# EAGLE board 13660_weather-bit-panel.v10 (EAGLE 7.5.0), part 1 of 2
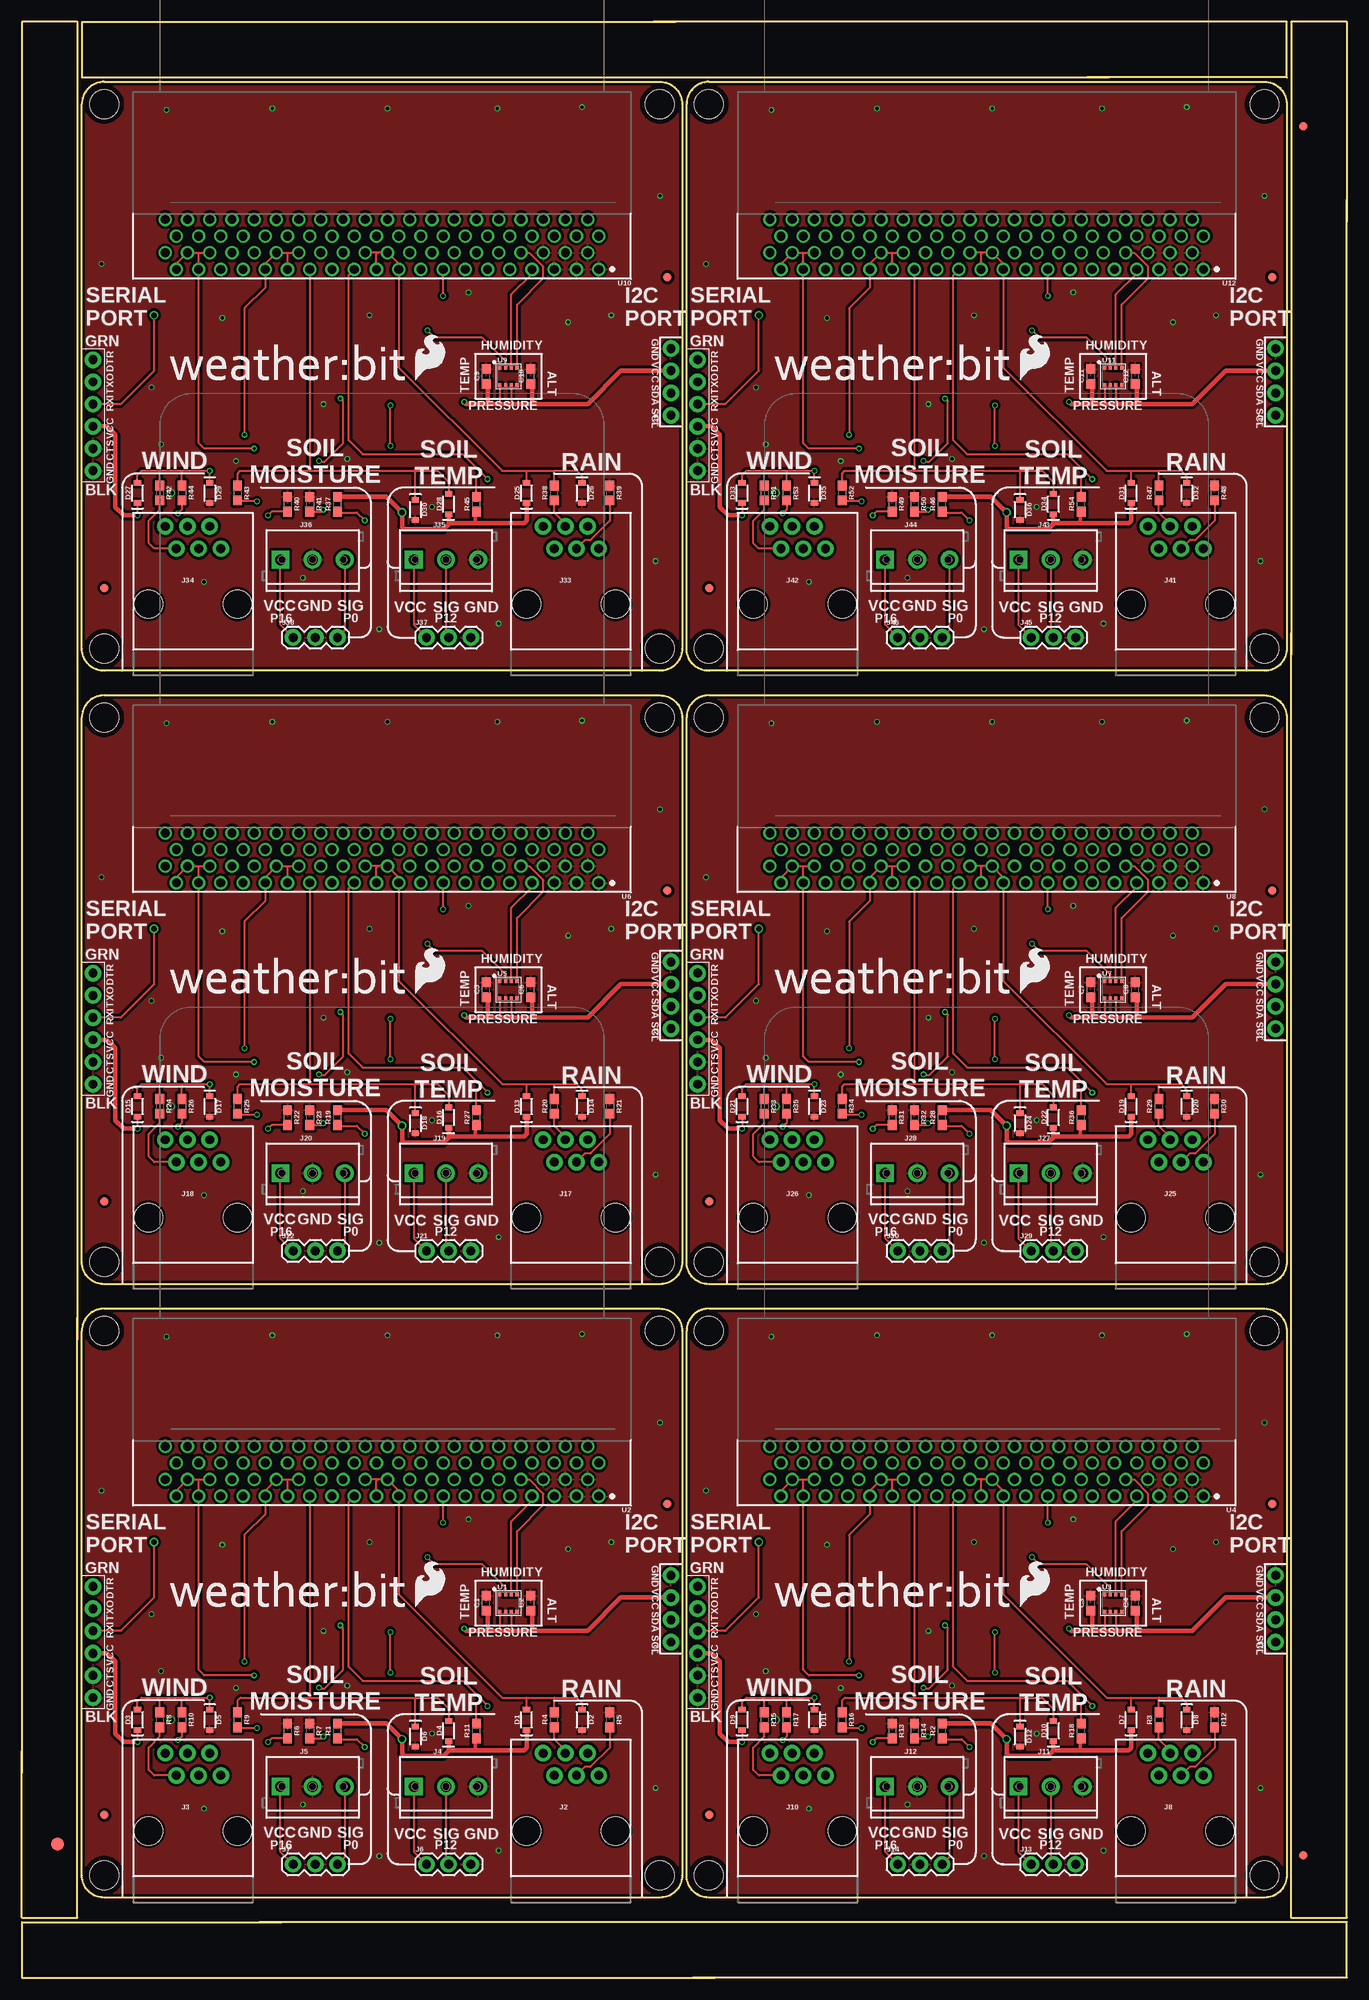
[diagram p0: board, top side]
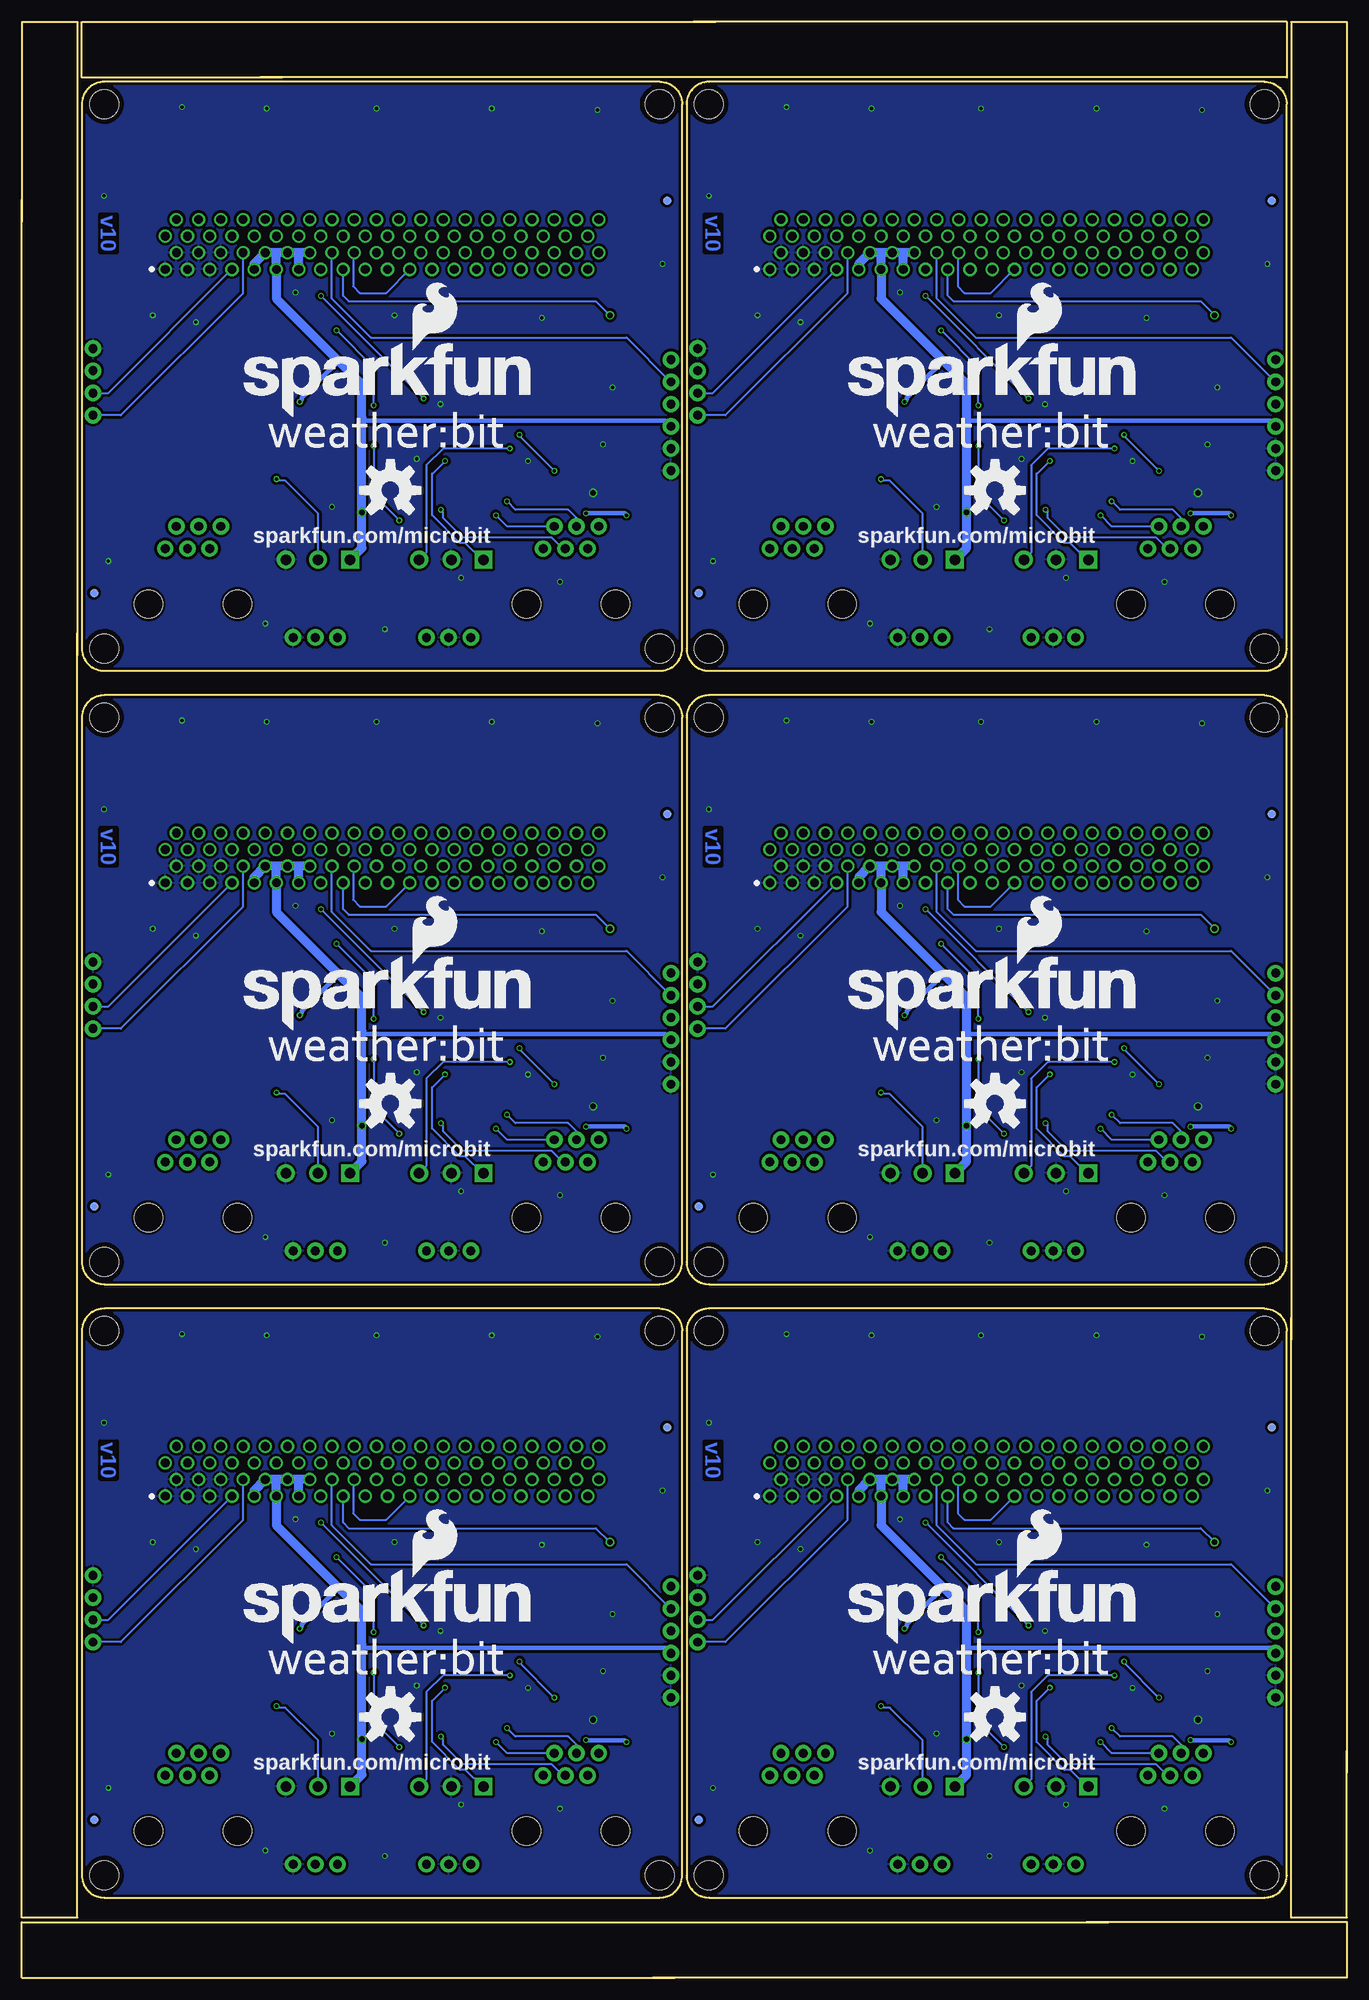
[diagram p1: board, bottom side, seen from below]

Size 151.38 x 223.52 mm. Coordinates in mm from the lower left corner, seen from the top.
Outline: 6.35,75.44 6.35,6.86 0,6.86 0,25.91
Outline: 0,23.37 0,223.52 6.35,223.52 6.35,72.9
Outline: 79.25,0 0,0 0,6.35 29.72,6.35
Outline: 27.18,6.35 151.38,6.35 151.38,0 76.71,0
Outline: 72.14,223.52 144.53,223.52 144.53,217.17 121.67,217.17
Outline: 124.21,217.17 6.86,217.17 6.86,223.52 74.68,223.52
Outline: 145.03,151.13 145.03,223.52 151.38,223.52 151.38,200.66
Outline: 151.38,203.2 151.38,6.86 145.03,6.86 145.03,153.67
Outline: 9.4,76.45 72.9,76.45 arc-90 75.44,73.91 75.44,11.68 arc-90 72.9,9.14 9.4,9.14 arc-90 6.86,11.68 6.86,73.91 arc-90 9.4,76.45
Outline: 78.49,76.45 141.99,76.45 arc-90 144.53,73.91 144.53,11.68 arc-90 141.99,9.14 78.49,9.14 arc-90 75.95,11.68 75.95,73.91 arc-90 78.49,76.45
Outline: 9.4,146.56 72.9,146.56 arc-90 75.44,144.02 75.44,81.79 arc-90 72.9,79.25 9.4,79.25 arc-90 6.86,81.79 6.86,144.02 arc-90 9.4,146.56
Outline: 78.49,146.56 141.99,146.56 arc-90 144.53,144.02 144.53,81.79 arc-90 141.99,79.25 78.49,79.25 arc-90 75.95,81.79 75.95,144.02 arc-90 78.49,146.56
Outline: 9.4,216.66 72.9,216.66 arc-90 75.44,214.12 75.44,151.89 arc-90 72.9,149.35 9.4,149.35 arc-90 6.86,151.89 6.86,214.12 arc-90 9.4,216.66
Outline: 78.49,216.66 141.99,216.66 arc-90 144.53,214.12 144.53,151.89 arc-90 141.99,149.35 78.49,149.35 arc-90 75.95,151.89 75.95,214.12 arc-90 78.49,216.66
Copper layers (1*16): Top 0.035mm / dielectric 1.5mm / Bottom 0.035mm
Design rules "SparkFun-2-layer-FAB-LIMIT": minimum track width 4mil, minimum drill 6mil, track to track 4mil, track to pad 4mil, pad to pad 4mil, via to via 4mil, smd to smd 4mil, copper to edge 4mil, drill to drill 4mil, minimum pad ring 5mil, minimum via ring 5mil, stop-mask expansion 4mil, vias tented up to drill 25mil, thermal gap 10mil

## Footprints (pad centres in the part's own frame; a part is rotated, then mirrored left to right if it is on the bottom)
0603 = smd 1.1 x 1: 1 -0.85,0; 2 0.85,0
SOD-323 = smd 0.63 x 0.83: A 1.15,0; C -1.15,0
FIDUCIAL-1.5X3 = smd 1.5 x 1.5: 1 0,0
FIDUCIAL-1X2 = smd 1 x 1: 1 0,0
STAND-OFF = hole 3.302: 0,0
6_PIN_SERIAL_TARGET_SIDE_W_SILK = drill 1.016 pad 1.88: P$1 -6.35,0; P$2 -3.81,0; P$3 -1.27,0; P$4 1.27,0; P$5 3.81,0; P$6 6.35,0
RJ11-6 = drill 1.016 pad 1.88: 1 -3.175,8.89; 2 -1.905,6.35; 3 -0.635,8.89; 4 0.635,6.35; 5 1.905,8.89; 6 3.175,6.35 | hole 3.251: -5.08,0; 5.08,0
SCREWTERMINAL-3.5MM-3_LOCK.007S = drill 1.2 pad 2.032 square: 1 -0.178,0 | drill 1.2 pad 2.032: 2 3.5,0; 3 7.178,0
1X03 = drill 1.016 pad 1.88: 1 0,0; 2 2.54,0; 3 5.08,0
1X04_NO_SILK = drill 1.016 pad 1.88: 1 0,0; 2 2.54,0; 3 5.08,0; 4 7.62,0
LGA-8-2.5X2.5 = smd 0.35 x 0.5: 1 -0.975,1.025; 2 -0.325,1.025; 3 0.325,1.025; 4 0.975,1.025; 5 0.975,-1.025; 6 0.325,-1.025; 7 -0.325,-1.025; 8 -0.975,-1.025
MICRO:BIT_RA_PTH = drill 1: A1 -24.765,7.62; A2 -23.495,5.72; A3 -22.225,7.62; A4 -20.955,5.72; A5 -19.685,7.62; A6 -18.415,5.72; A7 -17.145,7.62; A8 -15.875,5.72; A9 -14.605,7.62; A10 -13.335,5.72; A11 -12.065,7.62; A12 -10.795,5.72; A13 -9.525,7.62; A14 -8.255,5.72; A15 -6.985,7.62; A16 -5.715,5.72; A17 -4.445,7.62; A18 -3.175,5.72; A19 -1.905,7.62; A20 -0.635,5.72; A21 0.635,7.62; A22 1.905,5.72; A23 3.175,7.62; A24 4.445,5.72; A25 5.715,7.62; A26 6.985,5.72; A27 8.255,7.62; A28 9.525,5.72; A29 10.795,7.62; A30 12.065,5.72; A31 13.335,7.62; A32 14.605,5.72; A33 15.875,7.62; A34 17.145,5.72; A35 18.415,7.62; A36 19.685,5.72; A37 20.955,7.62; A38 22.225,5.72; A39 23.495,7.62; A40 24.765,5.72; B1 -24.765,3.82; B2 -23.495,1.92; B3 -22.225,3.82; B4 -20.955,1.92; B5 -19.685,3.82; B6 -18.415,1.92; B7 -17.145,3.82; B8 -15.875,1.92; B9 -14.605,3.82; B10 -13.335,1.92; B11 -12.065,3.82; B12 -10.795,1.92; B13 -9.525,3.82; B14 -8.255,1.92; B15 -6.985,3.82; B16 -5.715,1.92; B17 -4.445,3.82; B18 -3.175,1.92; B19 -1.905,3.82; B20 -0.635,1.92; B21 0.635,3.82; B22 1.905,1.92; B23 3.175,3.82; B24 4.445,1.92; B25 5.715,3.82; B26 6.985,1.92; B27 8.255,3.82; B28 9.525,1.92; B29 10.795,3.82; B30 12.065,1.92; B31 13.335,3.82; B32 14.605,1.92; B33 15.875,3.82; B34 17.145,1.92; B35 18.415,3.82; B36 19.685,1.92; B37 20.955,3.82; B38 22.225,1.92; B39 23.495,3.82; B40 24.765,1.92

## Placement (x,y rotation side)
C1  0.1uF  [0603]  53.05,42.8 90 top
C2  0.1uF  [0603]  58.13,42.8 90 top
C3  0.1uF  [0603]  122.14,42.8 90 top
C4  0.1uF  [0603]  127.22,42.8 90 top
C5  0.1uF  [0603]  53.05,112.9 90 top
C6  0.1uF  [0603]  58.13,112.9 90 top
C7  0.1uF  [0603]  122.14,112.9 90 top
C8  0.1uF  [0603]  127.22,112.9 90 top
C9  0.1uF  [0603]  53.05,183.01 90 top
C10  0.1uF  [0603]  58.13,183.01 90 top
C11  0.1uF  [0603]  122.14,183.01 90 top
C12  0.1uF  [0603]  127.22,183.01 90 top
D1  250mA/100V  [SOD-323]  57.66,29.46 90 top
D2  250mA/100V  [SOD-323]  64.01,29.46 270 top
D3  250mA/100V  [SOD-323]  13.21,29.46 90 top
D4  250mA/100V  [SOD-323]  48.77,28.19 90 top
D5  250mA/100V  [SOD-323]  21.46,29.46 270 top
D6  250mA/100V  [SOD-323]  44.96,27.56 270 top
D7  250mA/100V  [SOD-323]  126.75,29.46 90 top
D8  250mA/100V  [SOD-323]  133.1,29.46 270 top
D9  250mA/100V  [SOD-323]  82.3,29.46 90 top
D10  250mA/100V  [SOD-323]  117.86,28.19 90 top
D11  250mA/100V  [SOD-323]  90.55,29.46 270 top
D12  250mA/100V  [SOD-323]  114.05,27.56 270 top
D13  250mA/100V  [SOD-323]  57.66,99.57 90 top
D14  250mA/100V  [SOD-323]  64.01,99.57 270 top
D15  250mA/100V  [SOD-323]  13.21,99.57 90 top
D16  250mA/100V  [SOD-323]  48.77,98.3 90 top
D17  250mA/100V  [SOD-323]  21.46,99.57 270 top
D18  250mA/100V  [SOD-323]  44.96,97.66 270 top
D19  250mA/100V  [SOD-323]  126.75,99.57 90 top
D20  250mA/100V  [SOD-323]  133.1,99.57 270 top
D21  250mA/100V  [SOD-323]  82.3,99.57 90 top
D22  250mA/100V  [SOD-323]  117.86,98.3 90 top
D23  250mA/100V  [SOD-323]  90.55,99.57 270 top
D24  250mA/100V  [SOD-323]  114.05,97.66 270 top
D25  250mA/100V  [SOD-323]  57.66,169.67 90 top
D26  250mA/100V  [SOD-323]  64.01,169.67 270 top
D27  250mA/100V  [SOD-323]  13.21,169.67 90 top
D28  250mA/100V  [SOD-323]  48.77,168.4 90 top
D29  250mA/100V  [SOD-323]  21.46,169.67 270 top
D30  250mA/100V  [SOD-323]  44.96,167.77 270 top
D31  250mA/100V  [SOD-323]  126.75,169.67 90 top
D32  250mA/100V  [SOD-323]  133.1,169.67 270 top
D33  250mA/100V  [SOD-323]  82.3,169.67 90 top
D34  250mA/100V  [SOD-323]  117.86,168.4 90 top
D35  250mA/100V  [SOD-323]  90.55,169.67 270 top
D36  250mA/100V  [SOD-323]  114.05,167.77 270 top
E$1  [FIDUCIAL-1.5X3]  4.06,15.24 0 top
E$7  [FIDUCIAL-1X2]  146.43,211.58 180 top
E$8  [FIDUCIAL-1X2]  146.43,13.97 0 top
FD1  FIDUCIAL1X2  [FIDUCIAL-1X2]  9.43,18.61 0 top
FD2  FIDUCIAL1X2  [FIDUCIAL-1X2]  73.76,54.13 0 top
FD3  FIDUCIAL1X2  [FIDUCIAL-1X2]  8.57,62.9 0 bottom
FD4  FIDUCIAL1X2  [FIDUCIAL-1X2]  74.04,18.03 0 bottom
FD5  FIDUCIAL1X2  [FIDUCIAL-1X2]  78.52,18.61 0 top
FD6  FIDUCIAL1X2  [FIDUCIAL-1X2]  142.84,54.13 0 top
FD7  FIDUCIAL1X2  [FIDUCIAL-1X2]  77.66,62.9 0 bottom
FD8  FIDUCIAL1X2  [FIDUCIAL-1X2]  143.13,18.03 0 bottom
FD9  FIDUCIAL1X2  [FIDUCIAL-1X2]  9.43,88.71 0 top
FD10  FIDUCIAL1X2  [FIDUCIAL-1X2]  73.76,124.24 0 top
FD11  FIDUCIAL1X2  [FIDUCIAL-1X2]  8.57,133 0 bottom
FD12  FIDUCIAL1X2  [FIDUCIAL-1X2]  74.04,88.14 0 bottom
FD13  FIDUCIAL1X2  [FIDUCIAL-1X2]  78.52,88.71 0 top
FD14  FIDUCIAL1X2  [FIDUCIAL-1X2]  142.84,124.24 0 top
FD15  FIDUCIAL1X2  [FIDUCIAL-1X2]  77.66,133 0 bottom
FD16  FIDUCIAL1X2  [FIDUCIAL-1X2]  143.13,88.14 0 bottom
FD17  FIDUCIAL1X2  [FIDUCIAL-1X2]  9.43,158.81 0 top
FD18  FIDUCIAL1X2  [FIDUCIAL-1X2]  73.76,194.34 0 top
FD19  FIDUCIAL1X2  [FIDUCIAL-1X2]  8.57,203.1 0 bottom
FD20  FIDUCIAL1X2  [FIDUCIAL-1X2]  74.04,158.24 0 bottom
FD21  FIDUCIAL1X2  [FIDUCIAL-1X2]  78.52,158.81 0 top
FD22  FIDUCIAL1X2  [FIDUCIAL-1X2]  142.84,194.34 0 top
FD23  FIDUCIAL1X2  [FIDUCIAL-1X2]  77.66,203.1 0 bottom
FD24  FIDUCIAL1X2  [FIDUCIAL-1X2]  143.13,158.24 0 bottom
H1  STAND-OFF  [STAND-OFF]  9.4,73.91 0 top
H2  STAND-OFF  [STAND-OFF]  72.9,73.91 0 top
H3  STAND-OFF  [STAND-OFF]  9.4,11.68 0 top
H4  STAND-OFF  [STAND-OFF]  72.9,11.68 0 top
H5  STAND-OFF  [STAND-OFF]  78.49,73.91 0 top
H6  STAND-OFF  [STAND-OFF]  141.99,73.91 0 top
H7  STAND-OFF  [STAND-OFF]  78.49,11.68 0 top
H8  STAND-OFF  [STAND-OFF]  141.99,11.68 0 top
H9  STAND-OFF  [STAND-OFF]  9.4,144.02 0 top
H10  STAND-OFF  [STAND-OFF]  72.9,144.02 0 top
H11  STAND-OFF  [STAND-OFF]  9.4,81.79 0 top
H12  STAND-OFF  [STAND-OFF]  72.9,81.79 0 top
H13  STAND-OFF  [STAND-OFF]  78.49,144.02 0 top
H14  STAND-OFF  [STAND-OFF]  141.99,144.02 0 top
H15  STAND-OFF  [STAND-OFF]  78.49,81.79 0 top
H16  STAND-OFF  [STAND-OFF]  141.99,81.79 0 top
H17  STAND-OFF  [STAND-OFF]  9.4,214.12 0 top
H18  STAND-OFF  [STAND-OFF]  72.9,214.12 0 top
H19  STAND-OFF  [STAND-OFF]  9.4,151.89 0 top
H20  STAND-OFF  [STAND-OFF]  72.9,151.89 0 top
H21  STAND-OFF  [STAND-OFF]  78.49,214.12 0 top
H22  STAND-OFF  [STAND-OFF]  141.99,214.12 0 top
H23  STAND-OFF  [STAND-OFF]  78.49,151.89 0 top
H24  STAND-OFF  [STAND-OFF]  141.99,151.89 0 top
J1  [6_PIN_SERIAL_TARGET_SIDE_W_SILK]  8.13,38.35 270 top
J2  RJ11  [RJ11-6]  62.74,16.76 0 top
J3  RJ11  [RJ11-6]  19.56,16.76 0 top
J4  [SCREWTERMINAL-3.5MM-3_LOCK.007S]  44.96,21.84 0 top
J5  [SCREWTERMINAL-3.5MM-3_LOCK.007S]  29.72,21.84 0 top
J6  [1X03]  46.23,12.95 0 top
J7  [1X03]  30.99,12.95 0 top
J8  RJ11  [RJ11-6]  131.83,16.76 0 top
J9  [1X04_NO_SILK]  74.17,38.35 90 top
J10  RJ11  [RJ11-6]  88.65,16.76 0 top
J11  [SCREWTERMINAL-3.5MM-3_LOCK.007S]  114.05,21.84 0 top
J12  [SCREWTERMINAL-3.5MM-3_LOCK.007S]  98.81,21.84 0 top
J13  [1X03]  115.32,12.95 0 top
J14  [1X03]  100.08,12.95 0 top
J15  [1X04_NO_SILK]  143.26,38.35 90 top
J16  [6_PIN_SERIAL_TARGET_SIDE_W_SILK]  77.22,38.35 270 top
J17  RJ11  [RJ11-6]  62.74,86.87 0 top
J18  RJ11  [RJ11-6]  19.56,86.87 0 top
J19  [SCREWTERMINAL-3.5MM-3_LOCK.007S]  44.96,91.95 0 top
J20  [SCREWTERMINAL-3.5MM-3_LOCK.007S]  29.72,91.95 0 top
J21  [1X03]  46.23,83.06 0 top
J22  [1X03]  30.99,83.06 0 top
J23  [1X04_NO_SILK]  74.17,108.46 90 top
J24  [6_PIN_SERIAL_TARGET_SIDE_W_SILK]  8.13,108.46 270 top
J25  RJ11  [RJ11-6]  131.83,86.87 0 top
J26  RJ11  [RJ11-6]  88.65,86.87 0 top
J27  [SCREWTERMINAL-3.5MM-3_LOCK.007S]  114.05,91.95 0 top
J28  [SCREWTERMINAL-3.5MM-3_LOCK.007S]  98.81,91.95 0 top
J29  [1X03]  115.32,83.06 0 top
J30  [1X03]  100.08,83.06 0 top
J31  [1X04_NO_SILK]  143.26,108.46 90 top
J32  [6_PIN_SERIAL_TARGET_SIDE_W_SILK]  77.22,108.46 270 top
J33  RJ11  [RJ11-6]  62.74,156.97 0 top
J34  RJ11  [RJ11-6]  19.56,156.97 0 top
J35  [SCREWTERMINAL-3.5MM-3_LOCK.007S]  44.96,162.05 0 top
J36  [SCREWTERMINAL-3.5MM-3_LOCK.007S]  29.72,162.05 0 top
J37  [1X03]  46.23,153.16 0 top
J38  [1X03]  30.99,153.16 0 top
J39  [1X04_NO_SILK]  74.17,178.56 90 top
J40  [6_PIN_SERIAL_TARGET_SIDE_W_SILK]  8.13,178.56 270 top
J41  RJ11  [RJ11-6]  131.83,156.97 0 top
J42  RJ11  [RJ11-6]  88.65,156.97 0 top
J43  [SCREWTERMINAL-3.5MM-3_LOCK.007S]  114.05,162.05 0 top
J44  [SCREWTERMINAL-3.5MM-3_LOCK.007S]  98.81,162.05 0 top
J45  [1X03]  115.32,153.16 0 top
J46  [1X03]  100.08,153.16 0 top
J47  [1X04_NO_SILK]  143.26,178.56 90 top
J48  [6_PIN_SERIAL_TARGET_SIDE_W_SILK]  77.22,178.56 270 top
LOGO1  OSHW-LOGOL  [OSHW-LOGO-L]  109.28,29.78 0 bottom
LOGO2  SFE_LOGO_NAME_FLAME.3_INCH  [SFE_LOGO_NAME_FLAME_.3]  57.5,38.04 0 bottom
LOGO3  OSHW-LOGOL  [OSHW-LOGO-L]  40.2,29.78 0 bottom
LOGO4  SFE_LOGO_NAME_FLAME.3_INCH  [SFE_LOGO_NAME_FLAME_.3]  126.59,38.04 0 bottom
LOGO5  OSHW-LOGOL  [OSHW-LOGO-L]  40.2,99.89 0 bottom
LOGO6  SFE_LOGO_NAME_FLAME.3_INCH  [SFE_LOGO_NAME_FLAME_.3]  57.5,108.14 0 bottom
LOGO7  OSHW-LOGOL  [OSHW-LOGO-L]  109.28,99.89 0 bottom
LOGO8  SFE_LOGO_NAME_FLAME.3_INCH  [SFE_LOGO_NAME_FLAME_.3]  126.59,108.14 0 bottom
LOGO9  OSHW-LOGOL  [OSHW-LOGO-L]  40.2,169.99 0 bottom
LOGO10  SFE_LOGO_NAME_FLAME.3_INCH  [SFE_LOGO_NAME_FLAME_.3]  57.5,178.24 0 bottom
LOGO11  OSHW-LOGOL  [OSHW-LOGO-L]  109.28,169.99 0 bottom
LOGO12  SFE_LOGO_NAME_FLAME.3_INCH  [SFE_LOGO_NAME_FLAME_.3]  126.59,178.24 0 bottom
R1  4.7k  [0603]  36.07,28.19 90 top
R2  4.7k  [0603]  105.16,28.19 90 top
R3  1k  [0603]  129.92,29.46 90 top
R4  1k  [0603]  60.83,29.46 90 top
R5  1k  [0603]  67.18,29.46 270 top
R6  1k  [0603]  30.35,28.19 270 top
R7  1k  [0603]  32.89,28.19 270 top
R8  1k  [0603]  15.75,29.46 270 top
R9  1k  [0603]  24.64,29.46 270 top
R10  4.7k  [0603]  18.29,29.46 270 top
R11  4.7k  [0603]  51.94,28.19 90 top
R12  1k  [0603]  136.27,29.46 270 top
R13  1k  [0603]  99.44,28.19 270 top
R14  1k  [0603]  101.98,28.19 270 top
R15  1k  [0603]  84.84,29.46 270 top
R16  1k  [0603]  93.73,29.46 270 top
R17  4.7k  [0603]  87.38,29.46 270 top
R18  4.7k  [0603]  121.03,28.19 90 top
R19  4.7k  [0603]  36.07,98.3 90 top
R20  1k  [0603]  60.83,99.57 90 top
R21  1k  [0603]  67.18,99.57 270 top
R22  1k  [0603]  30.35,98.3 270 top
R23  1k  [0603]  32.89,98.3 270 top
R24  1k  [0603]  15.75,99.57 270 top
R25  1k  [0603]  24.64,99.57 270 top
R26  4.7k  [0603]  18.29,99.57 270 top
R27  4.7k  [0603]  51.94,98.3 90 top
R28  4.7k  [0603]  105.16,98.3 90 top
R29  1k  [0603]  129.92,99.57 90 top
R30  1k  [0603]  136.27,99.57 270 top
R31  1k  [0603]  99.44,98.3 270 top
R32  1k  [0603]  101.98,98.3 270 top
R33  1k  [0603]  84.84,99.57 270 top
R34  1k  [0603]  93.73,99.57 270 top
R35  4.7k  [0603]  87.38,99.57 270 top
R36  4.7k  [0603]  121.03,98.3 90 top
R37  4.7k  [0603]  36.07,168.4 90 top
R38  1k  [0603]  60.83,169.67 90 top
R39  1k  [0603]  67.18,169.67 270 top
R40  1k  [0603]  30.35,168.4 270 top
R41  1k  [0603]  32.89,168.4 270 top
R42  1k  [0603]  15.75,169.67 270 top
R43  1k  [0603]  24.64,169.67 270 top
R44  4.7k  [0603]  18.29,169.67 270 top
R45  4.7k  [0603]  51.94,168.4 90 top
R46  4.7k  [0603]  105.16,168.4 90 top
R47  1k  [0603]  129.92,169.67 90 top
R48  1k  [0603]  136.27,169.67 270 top
R49  1k  [0603]  99.44,168.4 270 top
R50  1k  [0603]  101.98,168.4 270 top
R51  1k  [0603]  84.84,169.67 270 top
R52  1k  [0603]  93.73,169.67 270 top
R53  4.7k  [0603]  87.38,169.67 270 top
R54  4.7k  [0603]  121.03,168.4 90 top
U1  BME280  [LGA-8-2.5X2.5]  55.59,42.8 0 top
U2  micro:bit  [MICRO:BIT_RA_PTH]  41.15,62.64 180 top
U3  BME280  [LGA-8-2.5X2.5]  124.68,42.8 0 top
U4  micro:bit  [MICRO:BIT_RA_PTH]  110.24,62.64 180 top
U5  BME280  [LGA-8-2.5X2.5]  55.59,112.9 0 top
U6  micro:bit  [MICRO:BIT_RA_PTH]  41.15,132.75 180 top
U7  BME280  [LGA-8-2.5X2.5]  124.68,112.9 0 top
U8  micro:bit  [MICRO:BIT_RA_PTH]  110.24,132.75 180 top
U9  BME280  [LGA-8-2.5X2.5]  55.59,183.01 0 top
U10  micro:bit  [MICRO:BIT_RA_PTH]  41.15,202.85 180 top
U11  BME280  [LGA-8-2.5X2.5]  124.68,183.01 0 top
U12  micro:bit  [MICRO:BIT_RA_PTH]  110.24,202.85 180 top
U$1  [SFE_LOGO_FLAME_.2]  44.62,42.16 0 top
U$2  [LOGO-WEATHERBIT]  16.77,42.16 0 top
U$3  [LOGO-WEATHERBIT]  54.28,34.44 0 bottom
U$4  [SFE_LOGO_FLAME_.2]  113.71,42.16 0 top
U$5  [LOGO-WEATHERBIT]  85.85,42.16 0 top
U$6  [LOGO-WEATHERBIT]  123.37,34.44 0 bottom
U$7  [SFE_LOGO_FLAME_.2]  44.62,112.26 0 top
U$8  [LOGO-WEATHERBIT]  16.77,112.27 0 top
U$9  [LOGO-WEATHERBIT]  54.28,104.55 0 bottom
U$10  [SFE_LOGO_FLAME_.2]  113.71,112.26 0 top
U$11  [LOGO-WEATHERBIT]  85.85,112.27 0 top
U$12  [LOGO-WEATHERBIT]  123.37,104.55 0 bottom
U$13  [SFE_LOGO_FLAME_.2]  44.62,182.36 0 top
U$14  [LOGO-WEATHERBIT]  16.77,182.37 0 top
U$15  [LOGO-WEATHERBIT]  54.28,174.65 0 bottom
U$16  [SFE_LOGO_FLAME_.2]  113.71,182.36 0 top
U$17  [LOGO-WEATHERBIT]  85.85,182.37 0 top
U$18  [LOGO-WEATHERBIT]  123.37,174.65 0 bottom

## Library data of the parts
C1-C12 = SparkFun-Capacitors; PROD_ID: CAP-00810
D1-D36 = SparkFun-DiscreteSemi; PROD_ID: DIO-09646
E$1 = SparkFun-Retired
E$7 E$8 FD1-FD24 LOGO1-LOGO12 U$1 U$4 U$7 U$10 U$13 U$16 = SparkFun-Aesthetics
H1-H24 = SparkFun-Electromechanical
J1 J6 J7 J13 J14 J16 J21 J22 J24 J29 J30 J32 J37 J38 J40 J45 J46 J48 = SparkFun-Connectors
J2 J3 J8 J10 J17 J18 J25 J26 J33 J34 J41 J42 = SparkFun-Connectors; PROD_ID: CONN-08590; SF_ID: PRT-00132
J4 J5 J11 J12 J19 J20 J27 J28 J35 J36 J43 J44 = SparkFun-Connectors; PROD_ID: CONN-08288; SF_ID: PRT-08235
J9 J15 J23 J31 J39 J47 = SparkFun-Connectors; PROD_ID: CONN-09696
R1 R2 R10 R11 R17-R19 R26-R28 R35-R37 R44-R46 R53 R54 = SparkFun-Resistors; PROD_ID: RES-07857
R3-R9 R12-R16 R20-R25 R29-R34 R38-R43 R47-R52 = SparkFun-Resistors; PROD_ID: RES-07856
U1 U3 U5 U7 U9 U11 = SparkFun-Sensors; PROD_ID: IC-13090
U2 U4 U6 U8 U10 U12 = Micro_Bit_Parts; PROD_ID: CONN-13452
U$2 U$3 U$5 U$6 U$8 U$9 U$11 U$12 U$14 U$15 U$17 U$18 = Micro_Bit_LOGOS

## Nets
1: U4.A24
2: U4.A25
3: U2.A40
3.3V: C1.1 C2.1 D1.C D3.C D4.C J1.P$4 J4.1 J6.1 J9.3 R1.2 R10.2 R11.1 U1.6 U1.8 U2.A9 U2.A10 U2.A11 U2.A12 U2.A13 U2.A14
3.3V1: C3.1 C4.1 D7.C D9.C D10.C J11.1 J13.1 J15.3 J16.P$4 R2.2 R17.2 R18.1 U3.6 U3.8 U4.A9 U4.A10 U4.A11 U4.A12 U4.A13 U4.A14
3.3V2: C5.1 C6.1 D13.C D15.C D16.C J19.1 J21.1 J23.3 J24.P$4 R19.2 R26.2 R27.1 U5.6 U5.8 U6.A9 U6.A10 U6.A11 U6.A12 U6.A13 U6.A14
3.3V3: C7.1 C8.1 D19.C D21.C D22.C J27.1 J29.1 J31.3 J32.P$4 R28.2 R35.2 R36.1 U7.6 U7.8 U8.A9 U8.A10 U8.A11 U8.A12 U8.A13 U8.A14
3.3V4: C9.1 C10.1 D25.C D27.C D28.C J35.1 J37.1 J39.3 J40.P$4 R37.2 R44.2 R45.1 U9.6 U9.8 U10.A9 U10.A10 U10.A11 U10.A12 U10.A13 U10.A14
3.3V5: C11.1 C12.1 D31.C D33.C D34.C J43.1 J45.1 J47.3 J48.P$4 R46.2 R53.2 R54.1 U11.6 U11.8 U12.A9 U12.A10 U12.A11 U12.A12 U12.A13 U12.A14
4: U2.A35
5: U2.A34
6: U2.A33
7: U2.A32
8: U4.A32
9: U2.A26
10: U2.A25
11: U2.A24
12: U4.A33
13: U4.A34
14: U4.A35
15: U4.A40
16: U4.A26
17: U6.A24
18: U6.A25
19: U6.A32
20: U6.A33
21: U6.A34
22: U6.A35
23: U6.A40
24: U6.A26
25: U8.A24
26: U8.A25
27: U8.A32
28: U8.A33
29: U8.A34
30: U8.A35
31: U8.A40
32: U8.A26
33: U10.A24
34: U10.A25
35: U10.A32
36: U10.A33
37: U10.A34
38: U10.A35
39: U10.A40
40: U10.A26
41: U12.A24
42: U12.A25
43: U12.A32
44: U12.A33
45: U12.A34
46: U12.A35
47: U12.A40
48: U12.A26
GND: C1.2 C2.2 D2.A D5.A D6.A J1.P$5 J1.P$6 J4.3 J5.2 J6.3 J7.2 J9.4 R5.1 R6.1 R7.1 U1.1 U1.5 U1.7 U2.A1 U2.A2 U2.A3 U2.A4 U2.A5 U2.A6
GND1: C3.2 C4.2 D8.A D11.A D12.A J11.3 J12.2 J13.3 J14.2 J15.4 J16.P$5 J16.P$6 R12.1 R13.1 R14.1 U3.1 U3.5 U3.7 U4.A1 U4.A2 U4.A3 U4.A4 U4.A5 U4.A6
GND2: C5.2 C6.2 D14.A D17.A D18.A J19.3 J20.2 J21.3 J22.2 J23.4 J24.P$5 J24.P$6 R21.1 R22.1 R23.1 U5.1 U5.5 U5.7 U6.A1 U6.A2 U6.A3 U6.A4 U6.A5 U6.A6
GND3: C7.2 C8.2 D20.A D23.A D24.A J27.3 J28.2 J29.3 J30.2 J31.4 J32.P$5 J32.P$6 R30.1 R31.1 R32.1 U7.1 U7.5 U7.7 U8.A1 U8.A2 U8.A3 U8.A4 U8.A5 U8.A6
GND4: C9.2 C10.2 D26.A D29.A D30.A J35.3 J36.2 J37.3 J38.2 J39.4 J40.P$5 J40.P$6 R39.1 R40.1 R41.1 U9.1 U9.5 U9.7 U10.A1 U10.A2 U10.A3 U10.A4 U10.A5 U10.A6
GND5: C11.2 C12.2 D32.A D35.A D36.A J43.3 J44.2 J45.3 J46.2 J47.4 J48.P$5 J48.P$6 R48.1 R49.1 R50.1 U11.1 U11.5 U11.7 U12.A1 U12.A2 U12.A3 U12.A4 U12.A5 U12.A6
N$2: R1.1 U1.2
N$3: R2.1 U3.2
N$4: J8.3 R3.1
N$5: J2.3 R4.1
N$6: J3.2 R8.2
N$7: J2.4 R5.2
N$8: J8.4 R12.2
N$9: J10.3 R16.2
N$11: J3.3 R9.2
N$12: J10.5 R13.2
N$13: J3.5 R6.2
N$14: J3.4 R7.2
N$15: J10.4 R14.2
N$16: J10.2 R15.2
N$17: R19.1 U5.2
N$18: J17.3 R20.1
N$19: J17.4 R21.2
N$20: J18.3 R25.2
N$21: J18.5 R22.2
N$22: J18.4 R23.2
N$23: J18.2 R24.2
N$24: R28.1 U7.2
N$25: J25.3 R29.1
N$26: J25.4 R30.2
N$27: J26.3 R34.2
N$28: J26.5 R31.2
N$29: J26.4 R32.2
N$30: J26.2 R33.2
N$31: R37.1 U9.2
N$32: J33.3 R38.1
N$33: J33.4 R39.2
N$34: J34.3 R43.2
N$35: J34.5 R40.2
N$36: J34.4 R41.2
N$37: J34.2 R42.2
N$38: R46.1 U11.2
N$39: J41.3 R47.1
N$40: J41.4 R48.2
N$41: J42.3 R52.2
N$42: J42.5 R49.2
N$43: J42.4 R50.2
N$44: J42.2 R51.2
RAIN: D1.A D2.C R4.2 U2.A19 U2.A20 U2.A21 U2.A22
RAIN1: D7.A D8.C R3.2 U4.A19 U4.A20 U4.A21 U4.A22
RAIN2: D13.A D14.C R20.2 U6.A19 U6.A20 U6.A21 U6.A22
RAIN3: D19.A D20.C R29.2 U8.A19 U8.A20 U8.A21 U8.A22
RAIN4: D25.A D26.C R38.2 U10.A19 U10.A20 U10.A21 U10.A22
RAIN5: D31.A D32.C R47.2 U12.A19 U12.A20 U12.A21 U12.A22
RXI: J1.P$3 U2.A17
RXI1: J16.P$3 U4.A17
RXI2: J24.P$3 U6.A17
RXI3: J32.P$3 U8.A17
RXI4: J40.P$3 U10.A17
RXI5: J48.P$3 U12.A17
SCL: J9.1 U1.4 U2.A8
SCL1: J15.1 U3.4 U4.A8
SCL2: J23.1 U5.4 U6.A8
SCL3: J31.1 U7.4 U8.A8
SCL4: J39.1 U9.4 U10.A8
SCL5: J47.1 U11.4 U12.A8
SDA: J9.2 U1.3 U2.A7
SDA1: J15.2 U3.3 U4.A7
SDA2: J23.2 U5.3 U6.A7
SDA3: J31.2 U7.3 U8.A7
SDA4: J39.2 U9.3 U10.A7
SDA5: J47.2 U11.3 U12.A7
SOIL_DAT: J5.3 J7.3 U2.A36 U2.A37 U2.A38 U2.A39
SOIL_DAT1: J12.3 J14.3 U4.A36 U4.A37 U4.A38 U4.A39
SOIL_DAT2: J20.3 J22.3 U6.A36 U6.A37 U6.A38 U6.A39
SOIL_DAT3: J28.3 J30.3 U8.A36 U8.A37 U8.A38 U8.A39
SOIL_DAT4: J36.3 J38.3 U10.A36 U10.A37 U10.A38 U10.A39
SOIL_DAT5: J44.3 J46.3 U12.A36 U12.A37 U12.A38 U12.A39
SOIL_PWR: J5.1 J7.1 U2.A15
SOIL_PWR1: J12.1 J14.1 U4.A15
SOIL_PWR2: J20.1 J22.1 U6.A15
SOIL_PWR3: J28.1 J30.1 U8.A15
SOIL_PWR4: J36.1 J38.1 U10.A15
SOIL_PWR5: J44.1 J46.1 U12.A15
TEMP_DAT: J4.2 J6.2 R11.2 U2.A18 U2.A23
TEMP_DAT1: J11.2 J13.2 R18.2 U4.A18 U4.A23
TEMP_DAT2: J19.2 J21.2 R27.2 U6.A18 U6.A23
TEMP_DAT3: J27.2 J29.2 R36.2 U8.A18 U8.A23
TEMP_DAT4: J35.2 J37.2 R45.2 U10.A18 U10.A23
TEMP_DAT5: J43.2 J45.2 R54.2 U12.A18 U12.A23
TXO: J1.P$2 U2.A16
TXO1: J16.P$2 U4.A16
TXO2: J24.P$2 U6.A16
TXO3: J32.P$2 U8.A16
TXO4: J40.P$2 U10.A16
TXO5: J48.P$2 U12.A16
WDIR: D3.A D5.C R8.1 R10.1 U2.A28 U2.A29 U2.A30 U2.A31
WDIR1: D9.A D11.C R15.1 R17.1 U4.A28 U4.A29 U4.A30 U4.A31
WDIR2: D15.A D17.C R24.1 R26.1 U6.A28 U6.A29 U6.A30 U6.A31
WDIR3: D21.A D23.C R33.1 R35.1 U8.A28 U8.A29 U8.A30 U8.A31
WDIR4: D27.A D29.C R42.1 R44.1 U10.A28 U10.A29 U10.A30 U10.A31
WDIR5: D33.A D35.C R51.1 R53.1 U12.A28 U12.A29 U12.A30 U12.A31
WSPEED: D4.A D6.C R9.1 U2.A27
WSPEED1: D10.A D12.C R16.1 U4.A27
WSPEED2: D16.A D18.C R25.1 U6.A27
WSPEED3: D22.A D24.C R34.1 U8.A27
WSPEED4: D28.A D30.C R43.1 U10.A27
WSPEED5: D34.A D36.C R52.1 U12.A27

## Tracks (layer width: path | path; a pad name or v marks a point on that pad's centre or on a via)
3.3V  (via drill 0.38, 0.64)
  Top 0.254: J4.1 44.78,14.4 J6.1 | U1.8 54.62,39.76 54.48,39.62 | U1.6 55.92,39.79 55.75,39.62 | D3.C v13.21,26.92 | R10.2 18.29,27.59 v17.84,27.15 | 48.86,26 48.77,25.91
  Top 0.406: R11.1 51.82,27.34 51.82,26
  Top 0.508: 58.29,39.62 58.29,41.79 C2.1 | C1.1 53.21,41.79 53.21,39.62 | J9.3 68.45,43.43 64.64,39.62 58.29,39.62 | 58.29,39.62 55.75,39.62 54.48,39.62 53.21,39.62 | R1.2 41.63,29.04 v43.43,27.24 43.43,25.59 43.69,25.34 48.2,25.34 48.77,25.91 | J1.P$4 9.72,37.08 10.67,36.13 10.67,27.88 11.62,26.92 v13.21,26.92 | D1.C 57.66,26.29 57.37,26 51.82,26 48.86,26 48.77,26.1 D4.C | 53.21,39.62 50.8,39.62 v50.55,39.88
  Bottom 0.508: v17.84,27.15 13.43,27.15 v13.21,26.92 | 43.43,38.04 43.12,37.72 8.76,37.72 J1.P$4 | v50.55,39.88 50.29,40.13 50.29,40.39 47.24,43.43 47.18,43.43 46.07,44.55
  Bottom 1.016: U2.A14 50.67,56.92 | 50.67,56.92 U2.A12 53.05,56.92 | 53.05,56.92 U2.A10 55.75,55.65 U2.A9 | 53.05,56.92 53.21,56.76 U2.A11 53.21,51.69 46.07,44.55 43.43,41.91 43.43,38.04 v43.43,27.24 43.43,23.19 J4.1 | U2.A13 50.67,56.92
3.3V1  (via drill 0.38, 0.64)
  Top 0.254: J11.1 113.87,14.4 J13.1 | U3.8 123.71,39.76 123.57,39.62 | U3.6 125.01,39.79 124.84,39.62 | D9.C v82.3,26.92 | R17.2 87.38,27.59 v86.93,27.15 | 117.95,26 117.86,25.91
  Top 0.406: R18.1 120.9,27.34 120.9,26
  Top 0.508: 127.38,39.62 127.38,41.79 C4.1 | C3.1 122.3,41.79 122.3,39.62 | J15.3 137.54,43.43 133.73,39.62 127.38,39.62 | 127.38,39.62 124.84,39.62 123.57,39.62 122.3,39.62 | R2.2 110.72,29.04 v112.52,27.24 112.52,25.59 112.78,25.34 117.28,25.34 117.86,25.91 | J16.P$4 78.8,37.08 79.76,36.13 79.76,27.88 80.71,26.92 v82.3,26.92 | D7.C 126.75,26.29 126.46,26 120.9,26 117.95,26 117.86,26.1 D10.C | 122.3,39.62 119.89,39.62 v119.63,39.88
  Bottom 0.508: v86.93,27.15 82.52,27.15 v82.3,26.92 | 112.52,38.04 112.2,37.72 77.85,37.72 J16.P$4 | v119.63,39.88 119.38,40.13 119.38,40.39 116.33,43.43 116.27,43.43 115.16,44.55
  Bottom 1.016: U4.A14 119.76,56.92 | 119.76,56.92 U4.A12 122.14,56.92 | 122.14,56.92 U4.A10 124.84,55.65 U4.A9 | 122.14,56.92 122.3,56.76 U4.A11 122.3,51.69 115.16,44.55 112.52,41.91 112.52,38.04 v112.52,27.24 112.52,23.19 J11.1 | U4.A13 119.76,56.92
3.3V2  (via drill 0.38, 0.64)
  Top 0.254: J19.1 44.78,84.51 J21.1 | U5.8 54.62,109.86 54.48,109.73 | U5.6 55.92,109.89 55.75,109.73 | D15.C v13.21,97.03 | R26.2 18.29,97.69 v17.84,97.25 | 48.86,96.11 48.77,96.01
  Top 0.406: R27.1 51.82,97.45 51.82,96.11
  Top 0.508: 58.29,109.73 58.29,111.89 C6.1 | C5.1 53.21,111.89 53.21,109.73 | J23.3 68.45,113.54 64.64,109.73 58.29,109.73 | 58.29,109.73 55.75,109.73 54.48,109.73 53.21,109.73 | R19.2 41.63,99.15 v43.43,97.35 43.43,95.69 43.69,95.44 48.2,95.44 48.77,96.01 | J24.P$4 9.72,107.19 10.67,106.24 10.67,97.98 11.62,97.03 v13.21,97.03 | D13.C 57.66,96.39 57.37,96.11 51.82,96.11 48.86,96.11 48.77,96.2 D16.C | 53.21,109.73 50.8,109.73 v50.55,109.98
  Bottom 0.508: v17.84,97.25 13.43,97.25 v13.21,97.03 | 43.43,108.14 43.12,107.82 8.76,107.82 J24.P$4 | v50.55,109.98 50.29,110.24 50.29,110.49 47.24,113.54 47.18,113.54 46.07,114.65
  Bottom 1.016: U6.A14 50.67,127.03 | 50.67,127.03 U6.A12 53.05,127.03 | 53.05,127.03 U6.A10 55.75,125.76 U6.A9 | 53.05,127.03 53.21,126.87 U6.A11 53.21,121.79 46.07,114.65 43.43,112.01 43.43,108.14 v43.43,97.35 43.43,93.29 J19.1 | U6.A13 50.67,127.03
3.3V3  (via drill 0.38, 0.64)
  Top 0.254: J27.1 113.87,84.51 J29.1 | U7.8 123.71,109.86 123.57,109.73 | U7.6 125.01,109.89 124.84,109.73 | D21.C v82.3,97.03 | R35.2 87.38,97.69 v86.93,97.25 | 117.95,96.11 117.86,96.01
  Top 0.406: R36.1 120.9,97.45 120.9,96.11
  Top 0.508: 127.38,109.73 127.38,111.89 C8.1 | C7.1 122.3,111.89 122.3,109.73 | J31.3 137.54,113.54 133.73,109.73 127.38,109.73 | 127.38,109.73 124.84,109.73 123.57,109.73 122.3,109.73 | R28.2 110.72,99.15 v112.52,97.35 112.52,95.69 112.78,95.44 117.28,95.44 117.86,96.01 | J32.P$4 78.8,107.19 79.76,106.24 79.76,97.98 80.71,97.03 v82.3,97.03 | D19.C 126.75,96.39 126.46,96.11 120.9,96.11 117.95,96.11 117.86,96.2 D22.C | 122.3,109.73 119.89,109.73 v119.63,109.98
  Bottom 0.508: v86.93,97.25 82.52,97.25 v82.3,97.03 | 112.52,108.14 112.2,107.82 77.85,107.82 J32.P$4 | v119.63,109.98 119.38,110.24 119.38,110.49 116.33,113.54 116.27,113.54 115.16,114.65
  Bottom 1.016: U8.A14 119.76,127.03 | 119.76,127.03 U8.A12 122.14,127.03 | 122.14,127.03 U8.A10 124.84,125.76 U8.A9 | 122.14,127.03 122.3,126.87 U8.A11 122.3,121.79 115.16,114.65 112.52,112.01 112.52,108.14 v112.52,97.35 112.52,93.29 J27.1 | U8.A13 119.76,127.03
3.3V4  (via drill 0.38, 0.64)
  Top 0.254: J35.1 44.78,154.61 J37.1 | U9.8 54.62,179.97 54.48,179.83 | U9.6 55.92,180 55.75,179.83 | D27.C v13.21,167.13 | R44.2 18.29,167.8 v17.84,167.35 | 48.86,166.21 48.77,166.12
  Top 0.406: R45.1 51.82,167.55 51.82,166.21
  Top 0.508: 58.29,179.83 58.29,182 C10.1 | C9.1 53.21,182 53.21,179.83 | J39.3 68.45,183.64 64.64,179.83 58.29,179.83 | 58.29,179.83 55.75,179.83 54.48,179.83 53.21,179.83 | R37.2 41.63,169.25 v43.43,167.45 43.43,165.8 43.69,165.54 48.2,165.54 48.77,166.12 | J40.P$4 9.72,177.29 10.67,176.34 10.67,168.08 11.62,167.13 v13.21,167.13 | D25.C 57.66,166.5 57.37,166.21 51.82,166.21 48.86,166.21 48.77,166.31 D28.C | 53.21,179.83 50.8,179.83 v50.55,180.09
  Bottom 0.508: v17.84,167.35 13.43,167.35 v13.21,167.13 | 43.43,178.24 43.12,177.93 8.76,177.93 J40.P$4 | v50.55,180.09 50.29,180.34 50.29,180.59 47.24,183.64 47.18,183.64 46.07,184.75
  Bottom 1.016: U10.A14 50.67,197.13 | 50.67,197.13 U10.A12 53.05,197.13 | 53.05,197.13 U10.A10 55.75,195.86 U10.A9 | 53.05,197.13 53.21,196.97 U10.A11 53.21,191.9 46.07,184.75 43.43,182.12 43.43,178.24 v43.43,167.45 43.43,163.4 J35.1 | U10.A13 50.67,197.13
3.3V5  (via drill 0.38, 0.64)
  Top 0.254: J43.1 113.87,154.61 J45.1 | U11.8 123.71,179.97 123.57,179.83 | U11.6 125.01,180 124.84,179.83 | D33.C v82.3,167.13 | R53.2 87.38,167.8 v86.93,167.35 | 117.95,166.21 117.86,166.12
  Top 0.406: R54.1 120.9,167.55 120.9,166.21
  Top 0.508: 127.38,179.83 127.38,182 C12.1 | C11.1 122.3,182 122.3,179.83 | J47.3 137.54,183.64 133.73,179.83 127.38,179.83 | 127.38,179.83 124.84,179.83 123.57,179.83 122.3,179.83 | R46.2 110.72,169.25 v112.52,167.45 112.52,165.8 112.78,165.54 117.28,165.54 117.86,166.12 | J48.P$4 78.8,177.29 79.76,176.34 79.76,168.08 80.71,167.13 v82.3,167.13 | D31.C 126.75,166.5 126.46,166.21 120.9,166.21 117.95,166.21 117.86,166.31 D34.C | 122.3,179.83 119.89,179.83 v119.63,180.09
  Bottom 0.508: v86.93,167.35 82.52,167.35 v82.3,167.13 | 112.52,178.24 112.2,177.93 77.85,177.93 J48.P$4 | v119.63,180.09 119.38,180.34 119.38,180.59 116.33,183.64 116.27,183.64 115.16,184.75
  Bottom 1.016: U12.A14 119.76,197.13 | 119.76,197.13 U12.A12 122.14,197.13 | 122.14,197.13 U12.A10 124.84,195.86 U12.A9 | 122.14,197.13 122.3,196.97 U12.A11 122.3,191.9 115.16,184.75 112.52,182.12 112.52,178.24 v112.52,167.45 112.52,163.4 J43.1 | U12.A13 119.76,197.13
GND  (via drill 0.38, 0.64)
  other vias: 16.54,73.25 64.01,73.56 54.32,73.41 41.78,73.41 28.61,73.41 40.83,13.91 62.42,48.99 39.72,49.78 34.48,39.62 72.42,21.69 72.9,63.44 14.8,41.53 15.91,35.02 9.08,55.66 22.89,49.47 24.48,33.12 32.1,19.78 37.18,33.37 54.48,14.54 46.86,27.88 17.02,29.46 20.83,19.3 67.34,49.78 51.04,52.38
  pour Top (isolate 0.305): 6.86,76.45 6.7,8.83 75.28,8.83 75.44,76.45
  pour Bottom (isolate 0.305): 6.86,76.45 6.7,8.83 75.28,8.83 75.44,76.45
GND1  (via drill 0.38, 0.64)
  other vias: 85.63,73.25 133.1,73.56 123.41,73.41 110.87,73.41 97.69,73.41 109.92,13.91 131.51,48.99 108.81,49.78 103.57,39.62 141.51,21.69 141.99,63.44 83.88,41.53 84.99,35.02 78.17,55.66 91.98,49.47 93.57,33.12 101.19,19.78 106.27,33.37 123.57,14.54 115.95,27.88 86.11,29.46 89.92,19.3 136.43,49.78 120.13,52.38
  pour Top (isolate 0.305): 75.95,76.45 75.79,8.83 144.37,8.83 144.53,76.45
  pour Bottom (isolate 0.305): 75.95,76.45 75.79,8.83 144.37,8.83 144.53,76.45
GND2  (via drill 0.38, 0.64)
  other vias: 16.54,143.35 64.01,143.67 54.32,143.51 41.78,143.51 28.61,143.51 40.83,84.01 62.42,119.09 39.72,119.89 34.48,109.73 72.42,91.79 72.9,133.54 14.8,111.63 15.91,105.12 9.08,125.76 22.89,119.57 24.48,103.22 32.1,89.88 37.18,103.47 54.48,84.65 46.86,97.98 17.02,99.57 20.83,89.41 67.34,119.89 51.04,122.48
  pour Top (isolate 0.305): 6.86,146.56 6.7,78.93 75.28,78.93 75.44,146.56
  pour Bottom (isolate 0.305): 6.86,146.56 6.7,78.93 75.28,78.93 75.44,146.56
GND3  (via drill 0.38, 0.64)
  other vias: 85.63,143.35 133.1,143.67 123.41,143.51 110.87,143.51 97.69,143.51 109.92,84.01 131.51,119.09 108.81,119.89 103.57,109.73 141.51,91.79 141.99,133.54 83.88,111.63 84.99,105.12 78.17,125.76 91.98,119.57 93.57,103.22 101.19,89.88 106.27,103.47 123.57,84.65 115.95,97.98 86.11,99.57 89.92,89.41 136.43,119.89 120.13,122.48
  pour Top (isolate 0.305): 75.95,146.56 75.79,78.93 144.37,78.93 144.53,146.56
  pour Bottom (isolate 0.305): 75.95,146.56 75.79,78.93 144.37,78.93 144.53,146.56
GND4  (via drill 0.38, 0.64)
  other vias: 16.54,213.46 64.01,213.77 54.32,213.61 41.78,213.61 28.61,213.61 40.83,154.11 62.42,189.2 39.72,189.99 34.48,179.83 72.42,161.89 72.9,203.64 14.8,181.74 15.91,175.23 9.08,195.87 22.89,189.67 24.48,173.32 32.1,159.99 37.18,173.58 54.48,154.75 46.86,168.08 17.02,169.67 20.83,159.51 67.34,189.99 51.04,192.59
  pour Top (isolate 0.305): 6.86,216.66 6.7,149.03 75.28,149.03 75.44,216.66
  pour Bottom (isolate 0.305): 6.86,216.66 6.7,149.03 75.28,149.03 75.44,216.66
GND5  (via drill 0.38, 0.64)
  other vias: 85.63,213.46 133.1,213.77 123.41,213.61 110.87,213.61 97.69,213.61 109.92,154.11 131.51,189.2 108.81,189.99 103.57,179.83 141.51,161.89 141.99,203.64 83.88,181.74 84.99,175.23 78.17,195.87 91.98,189.67 93.57,173.32 101.19,159.99 106.27,173.58 123.57,154.75 115.95,168.08 86.11,169.67 89.92,159.51 136.43,189.99 120.13,192.59
  pour Top (isolate 0.305): 75.95,216.66 75.79,149.03 144.37,149.03 144.53,216.66
  pour Bottom (isolate 0.305): 75.95,216.66 75.79,149.03 144.37,149.03 144.53,216.66
N$2  (via drill 0.38)
  Top 0.254: v42.1,34.86 v42.1,39.5 | R1.1 36.07,27.24 38.29,27.24 v39.18,26.35 | U1.2 55.27,44.55 52.58,47.24 47.15,47.24 v46.34,48.05
  Bottom 0.254: v42.1,39.5 42.1,43.81 v46.34,48.05 | v42.1,34.86 42.1,29.27 v39.18,26.35
N$3  (via drill 0.38)
  Top 0.254: v111.19,34.86 v111.19,39.5 | R2.1 105.16,27.24 107.38,27.24 v108.27,26.35 | U3.2 124.36,44.55 121.67,47.24 116.24,47.24 v115.43,48.05
  Bottom 0.254: v111.19,39.5 111.19,43.81 v115.43,48.05 | v111.19,34.86 111.19,29.27 v108.27,26.35
N$4
  Top 0.254: J8.3 131.19,25.97 129.92,27.24 R3.1
N$5
  Top 0.254: J2.3 62.1,25.97 60.83,27.24 R4.1
N$6
  Top 0.254: J3.2 15.11,23.11 14.48,23.75 14.48,26.29 15.75,27.56 R8.2
N$7
  Top 0.254: R5.2 67.18,26.29 64.96,24.07 64.33,24.07 J2.4
N$8
  Top 0.254: R12.2 136.27,26.29 134.05,24.07 133.41,24.07 J8.4
N$9  (via drill 0.38)
  Top 0.254: v95.95,28.51 93.83,28.51 R16.2
  Bottom 0.254: J10.3 88.01,26.61 88.96,27.56 95,27.56 v95.95,28.51
N$11  (via drill 0.38)
  Top 0.254: v26.86,28.51 24.74,28.51 R9.2
  Bottom 0.254: J3.3 18.92,26.61 19.88,27.56 25.91,27.56 v26.86,28.51
N$12  (via drill 0.38)
  Top 0.254: R13.2 97.64,27.34 v97.22,26.92
  Bottom 0.254: J10.5 95.95,25.65 v97.22,26.92
N$13  (via drill 0.38)
  Top 0.254: R6.2 28.55,27.34 v28.13,26.92
  Bottom 0.254: J3.5 26.86,25.65 v28.13,26.92
N$14  (via drill 0.38)
  Top 0.254: R7.2 34.22,27.34 v34.43,27.56
  Bottom 0.254: J3.4 20.51,23.11 21.78,24.38 31.94,24.38 34.16,26.61 34.16,27.29 v34.43,27.56
N$15  (via drill 0.38)
  Top 0.254: R14.2 103.31,27.34 v103.52,27.56
  Bottom 0.254: J10.4 89.6,23.11 90.87,24.38 101.03,24.38 103.25,26.61 103.25,27.29 v103.52,27.56
N$16
  Top 0.254: J10.2 84.2,23.11 83.57,23.75 83.57,26.29 84.84,27.56 R15.2
N$17  (via drill 0.38)
  Top 0.254: v42.1,104.97 v42.1,109.6 | R19.1 36.07,97.35 38.29,97.35 v39.18,96.46 | U5.2 55.27,114.66 52.58,117.35 47.15,117.35 v46.34,118.16
  Bottom 0.254: v42.1,109.6 42.1,113.91 v46.34,118.16 | v42.1,104.97 42.1,99.38 v39.18,96.46
N$18
  Top 0.254: J17.3 62.1,96.08 60.83,97.35 R20.1
N$19
  Top 0.254: R21.2 67.18,96.39 64.96,94.17 64.33,94.17 J17.4
N$20  (via drill 0.38)
  Top 0.254: v26.86,98.61 24.74,98.61 R25.2
  Bottom 0.254: J18.3 18.92,96.71 19.88,97.66 25.91,97.66 v26.86,98.61
N$21  (via drill 0.38)
  Top 0.254: R22.2 28.55,97.45 v28.13,97.03
  Bottom 0.254: J18.5 26.86,95.76 v28.13,97.03
N$22  (via drill 0.38)
  Top 0.254: R23.2 34.22,97.45 v34.43,97.66
  Bottom 0.254: J18.4 20.51,93.22 21.78,94.49 31.94,94.49 34.16,96.71 34.16,97.39 v34.43,97.66
N$23
  Top 0.254: J18.2 15.11,93.22 14.48,93.85 14.48,96.39 15.75,97.66 R24.2
N$24  (via drill 0.38)
  Top 0.254: v111.19,104.97 v111.19,109.6 | R28.1 105.16,97.35 107.38,97.35 v108.27,96.46 | U7.2 124.36,114.66 121.67,117.35 116.24,117.35 v115.43,118.16
  Bottom 0.254: v111.19,109.6 111.19,113.91 v115.43,118.16 | v111.19,104.97 111.19,99.38 v108.27,96.46
N$25
  Top 0.254: J25.3 131.19,96.08 129.92,97.35 R29.1
N$26
  Top 0.254: R30.2 136.27,96.39 134.05,94.17 133.41,94.17 J25.4
N$27  (via drill 0.38)
  Top 0.254: v95.95,98.61 93.83,98.61 R34.2
  Bottom 0.254: J26.3 88.01,96.71 88.96,97.66 95,97.66 v95.95,98.61
N$28  (via drill 0.38)
  Top 0.254: R31.2 97.64,97.45 v97.22,97.03
  Bottom 0.254: J26.5 95.95,95.76 v97.22,97.03
N$29  (via drill 0.38)
  Top 0.254: R32.2 103.31,97.45 v103.52,97.66
  Bottom 0.254: J26.4 89.6,93.22 90.87,94.49 101.03,94.49 103.25,96.71 103.25,97.39 v103.52,97.66
N$30
  Top 0.254: J26.2 84.2,93.22 83.57,93.85 83.57,96.39 84.84,97.66 R33.2
N$31  (via drill 0.38)
  Top 0.254: v42.1,175.07 v42.1,179.71 | R37.1 36.07,167.45 38.29,167.45 v39.18,166.56 | U9.2 55.27,184.76 52.58,187.45 47.15,187.45 v46.34,188.26
  Bottom 0.254: v42.1,179.71 42.1,184.01 v46.34,188.26 | v42.1,175.07 42.1,169.48 v39.18,166.56
N$32
  Top 0.254: J33.3 62.1,166.18 60.83,167.45 R38.1
N$33
  Top 0.254: R39.2 67.18,166.5 64.96,164.27 64.33,164.27 J33.4
N$34  (via drill 0.38)
  Top 0.254: v26.86,168.72 24.74,168.72 R43.2
  Bottom 0.254: J34.3 18.92,166.81 19.88,167.77 25.91,167.77 v26.86,168.72
N$35  (via drill 0.38)
  Top 0.254: R40.2 28.55,167.55 v28.13,167.13
  Bottom 0.254: J34.5 26.86,165.86 v28.13,167.13
N$36  (via drill 0.38)
  Top 0.254: R41.2 34.22,167.55 v34.43,167.77
  Bottom 0.254: J34.4 20.51,163.32 21.78,164.59 31.94,164.59 34.16,166.81 34.16,167.5 v34.43,167.77
N$37
  Top 0.254: J34.2 15.11,163.32 14.48,163.96 14.48,166.5 15.75,167.77 R42.2
N$38  (via drill 0.38)
  Top 0.254: v111.19,175.07 v111.19,179.71 | R46.1 105.16,167.45 107.38,167.45 v108.27,166.56 | U11.2 124.36,184.76 121.67,187.45 116.24,187.45 v115.43,188.26
  Bottom 0.254: v111.19,179.71 111.19,184.01 v115.43,188.26 | v111.19,175.07 111.19,169.48 v108.27,166.56
N$39
  Top 0.254: J41.3 131.19,166.18 129.92,167.45 R47.1
N$40
  Top 0.254: R48.2 136.27,166.5 134.05,164.27 133.41,164.27 J41.4
N$41  (via drill 0.38)
  Top 0.254: v95.95,168.72 93.83,168.72 R52.2
  Bottom 0.254: J42.3 88.01,166.81 88.96,167.77 95,167.77 v95.95,168.72
N$42  (via drill 0.38)
  Top 0.254: R49.2 97.64,167.55 v97.22,167.13
  Bottom 0.254: J42.5 95.95,165.86 v97.22,167.13
N$43  (via drill 0.38)
  Top 0.254: R50.2 103.31,167.55 v103.52,167.77
  Bottom 0.254: J42.4 89.6,163.32 90.87,164.59 101.03,164.59 103.25,166.81 103.25,167.5 v103.52,167.77
N$44
  Top 0.254: J42.2 84.2,163.32 83.57,163.96 83.57,166.5 84.84,167.77 R51.2
RAIN
  Top 0.254: 57.66,30.42 D1.A 57.66,32 | 40.67,56.92 U2.A20 43.05,55.65 U2.A19 43.05,43.81 54.86,32 57.66,32 | 40.67,56.92 U2.A22 | U2.A21 40.51,56.76 40.67,56.92 | 57.66,32 60.83,32 | 60.83,32 63.37,32 64.01,31.37 D2.C | R4.2 60.83,32
RAIN1
  Top 0.254: 126.75,30.42 D7.A 126.75,32 | 109.76,56.92 U4.A20 112.14,55.65 U4.A19 112.14,43.81 123.95,32 126.75,32 | 109.76,56.92 U4.A22 | U4.A21 109.6,56.76 109.76,56.92 | 126.75,32 129.92,32 | 129.92,32 132.46,32 133.1,31.37 D8.C | R3.2 129.92,32
RAIN2
  Top 0.254: 57.66,100.52 D13.A 57.66,102.11 | 40.67,127.03 U6.A20 43.05,125.76 U6.A19 43.05,113.92 54.86,102.11 57.66,102.11 | 40.67,127.03 U6.A22 | U6.A21 40.51,126.87 40.67,127.03 | 57.66,102.11 60.83,102.11 | 60.83,102.11 63.37,102.11 64.01,101.47 D14.C | R20.2 60.83,102.11
RAIN3
  Top 0.254: 126.75,100.52 D19.A 126.75,102.11 | 109.76,127.03 U8.A20 112.14,125.76 U8.A19 112.14,113.92 123.95,102.11 126.75,102.11 | 109.76,127.03 U8.A22 | U8.A21 109.6,126.87 109.76,127.03 | 126.75,102.11 129.92,102.11 | 129.92,102.11 132.46,102.11 133.1,101.47 D20.C | R29.2 129.92,102.11
RAIN4
  Top 0.254: 57.66,170.62 D25.A 57.66,172.21 | 40.67,197.13 U10.A20 43.05,195.86 U10.A19 43.05,184.02 54.86,172.21 57.66,172.21 | 40.67,197.13 U10.A22 | U10.A21 40.51,196.97 40.67,197.13 | 57.66,172.21 60.83,172.21 | 60.83,172.21 63.37,172.21 64.01,171.58 D26.C | R38.2 60.83,172.21
RAIN5
  Top 0.254: 126.75,170.62 D31.A 126.75,172.21 | 109.76,197.13 U12.A20 112.14,195.86 U12.A19 112.14,184.02 123.95,172.21 126.75,172.21 | 109.76,197.13 U12.A22 | U12.A21 109.6,196.97 109.76,197.13 | 126.75,172.21 129.92,172.21 | 129.92,172.21 132.46,172.21 133.1,171.58 D32.C | R47.2 129.92,172.21
RXI  (via drill 0.64)
  Top 0.254: J1.P$3 11.3,39.62 15.11,43.43 v15.11,49.78
  Bottom 0.254: U2.A17 45.59,52.01 44.96,51.37 16.7,51.37 v15.11,49.78
RXI1  (via drill 0.64)
  Top 0.254: J16.P$3 80.39,39.62 84.2,43.43 v84.2,49.78
  Bottom 0.254: U4.A17 114.68,52.01 114.05,51.37 85.79,51.37 v84.2,49.78
RXI2  (via drill 0.64)
  Top 0.254: J24.P$3 11.3,109.73 15.11,113.54 v15.11,119.89
  Bottom 0.254: U6.A17 45.59,122.11 44.96,121.47 16.7,121.47 v15.11,119.89
RXI3  (via drill 0.64)
  Top 0.254: J32.P$3 80.39,109.73 84.2,113.54 v84.2,119.89
  Bottom 0.254: U8.A17 114.68,122.11 114.05,121.47 85.79,121.47 v84.2,119.89
RXI4  (via drill 0.64)
  Top 0.254: J40.P$3 11.3,179.83 15.11,183.64 v15.11,189.99
  Bottom 0.254: U10.A17 45.59,192.21 44.96,191.58 16.7,191.58 v15.11,189.99
RXI5  (via drill 0.64)
  Top 0.254: J48.P$3 80.39,179.83 84.2,183.64 v84.2,189.99
  Bottom 0.254: U12.A17 114.68,192.21 114.05,191.58 85.79,191.58 v84.2,189.99
SCL
  Top 0.254: U2.A8 57.99,56.92 59.6,55.31 59.6,54.03 56.58,51.01 56.58,43.83 U1.4
  Bottom 0.254: U2.A8 57.02,52.32 70.99,38.35 J9.1
SCL1
  Top 0.254: U4.A8 127.08,56.92 128.68,55.31 128.68,54.03 125.66,51.01 125.66,43.83 U3.4
  Bottom 0.254: U4.A8 126.11,52.32 140.08,38.35 J15.1
SCL2
  Top 0.254: U6.A8 57.99,127.03 59.6,125.42 59.6,124.13 56.58,121.11 U5.4
  Bottom 0.254: U6.A8 57.02,122.43 70.99,108.46 J23.1
SCL3
  Top 0.254: U8.A8 127.08,127.03 128.68,125.42 128.68,124.13 125.66,121.11 U7.4
  Bottom 0.254: U8.A8 126.11,122.43 140.08,108.46 J31.1
SCL4
  Top 0.254: U10.A8 57.99,197.13 59.6,195.52 59.6,194.24 56.58,191.22 U9.4
  Bottom 0.254: U10.A8 57.02,192.53 70.99,178.56 J39.1
SCL5
  Top 0.254: U12.A8 127.08,197.13 128.68,195.52 128.68,194.24 125.66,191.22 U11.4
  Bottom 0.254: U12.A8 126.11,192.53 140.08,178.56 J47.1
SDA
  Top 0.254: U2.A7 58.29,54.55 55.92,52.17 U1.3
  Bottom 0.254: J9.2 72.42,40.89 U2.A7
SDA1
  Top 0.254: U4.A7 127.38,54.55 125.01,52.17 U3.3
  Bottom 0.254: J15.2 141.51,40.89 U4.A7
SDA2
  Top 0.254: U6.A7 58.29,124.65 55.92,122.28 U5.3
  Bottom 0.254: J23.2 72.42,111 U6.A7
SDA3
  Top 0.254: U8.A7 127.38,124.65 125.01,122.28 U7.3
  Bottom 0.254: J31.2 141.51,111 U8.A7
SDA4
  Top 0.254: U10.A7 58.29,194.75 55.92,192.38 U9.3
  Bottom 0.254: J39.2 72.42,181.1 U10.A7
SDA5
  Top 0.254: U12.A7 127.38,194.75 125.01,192.38 U11.3
  Bottom 0.254: J47.2 141.51,181.1 U12.A7
SOIL_DAT  (via drill 0.38)
  Top 0.254: J5.3 36.9,13.78 J7.3 | v26.54,34.54 20.83,34.54 20.19,35.18 U2.A37 20.19,56.92 | 20.19,56.92 U2.A38 17.65,55.65 U2.A39 | 20.19,56.92 U2.A36
  Bottom 0.254: v26.54,34.54 34.16,34.54 36.07,32.64 36.07,22.67 J5.3
SOIL_DAT1  (via drill 0.38)
  Top 0.254: J12.3 105.98,13.78 J14.3 | v95.63,34.54 89.92,34.54 89.28,35.18 U4.A37 89.28,56.92 | 89.28,56.92 U4.A38 86.74,55.65 U4.A39 | 89.28,56.92 U4.A36
  Bottom 0.254: v95.63,34.54 103.25,34.54 105.16,32.64 105.16,22.67 J12.3
SOIL_DAT2  (via drill 0.38)
  Top 0.254: J20.3 36.9,83.89 J22.3 | v26.54,104.65 20.83,104.65 20.19,105.28 U6.A37 20.19,127.03 | 20.19,127.03 U6.A38 17.65,125.76 U6.A39 | 20.19,127.03 U6.A36
  Bottom 0.254: v26.54,104.65 34.16,104.65 36.07,102.74 36.07,92.78 J20.3
SOIL_DAT3  (via drill 0.38)
  Top 0.254: J28.3 105.98,83.89 J30.3 | v95.63,104.65 89.92,104.65 89.28,105.28 U8.A37 89.28,127.03 | 89.28,127.03 U8.A38 86.74,125.76 U8.A39 | 89.28,127.03 U8.A36
  Bottom 0.254: v95.63,104.65 103.25,104.65 105.16,102.74 105.16,92.78 J28.3
SOIL_DAT4  (via drill 0.38)
  Top 0.254: J36.3 36.9,153.99 J38.3 | v26.54,174.75 20.83,174.75 20.19,175.39 U10.A37 20.19,197.13 | 20.19,197.13 U10.A38 17.65,195.86 U10.A39 | 20.19,197.13 U10.A36
  Bottom 0.254: v26.54,174.75 34.16,174.75 36.07,172.85 36.07,162.88 J36.3
SOIL_DAT5  (via drill 0.38)
  Top 0.254: J44.3 105.98,153.99 J46.3 | v95.63,174.75 89.92,174.75 89.28,175.39 U12.A37 89.28,197.13 | 89.28,197.13 U12.A38 86.74,195.86 U12.A39 | 89.28,197.13 U12.A36
  Bottom 0.254: v95.63,174.75 103.25,174.75 105.16,172.85 105.16,162.88 J44.3
SOIL_PWR  (via drill 0.38)
  Top 0.254: J7.1 29.54,14.4 J5.1 | v48.13,52.01 U2.A15 | v36.39,40.26 36.7,39.94 36.7,35.18 34.54,33.02 34.04,33.02 v33.94,33.12
  Bottom 0.254: v36.39,40.26 v48.13,52.01 | J5.1 29.72,21.84 31.62,23.75 32.26,23.75 35.43,26.92 35.43,31.69 35.37,31.69 v33.94,33.12
SOIL_PWR1  (via drill 0.38)
  Top 0.254: J14.1 98.63,14.4 J12.1 | v117.22,52.01 U4.A15 | v105.47,40.26 105.79,39.94 105.79,35.18 103.63,33.02 103.13,33.02 v103.02,33.12
  Bottom 0.254: v105.47,40.26 v117.22,52.01 | J12.1 98.81,21.84 100.71,23.75 101.35,23.75 104.52,26.92 104.52,31.69 104.46,31.69 v103.02,33.12
SOIL_PWR2  (via drill 0.38)
  Top 0.254: J22.1 29.54,84.51 J20.1 | v48.13,122.11 U6.A15 | v36.39,110.36 36.7,110.05 36.7,105.28 34.54,103.12 34.04,103.12 v33.94,103.23
  Bottom 0.254: v36.39,110.36 v48.13,122.11 | J20.1 29.72,91.95 31.62,93.85 32.26,93.85 35.43,97.03 35.43,101.79 35.37,101.79 v33.94,103.23
SOIL_PWR3  (via drill 0.38)
  Top 0.254: J30.1 98.63,84.51 J28.1 | v117.22,122.11 U8.A15 | v105.47,110.36 105.79,110.05 105.79,105.28 103.63,103.12 103.13,103.12 v103.02,103.23
  Bottom 0.254: v105.47,110.36 v117.22,122.11 | J28.1 98.81,91.95 100.71,93.85 101.35,93.85 104.52,97.03 104.52,101.79 104.46,101.79 v103.02,103.23
SOIL_PWR4  (via drill 0.38)
  Top 0.254: J38.1 29.54,154.61 J36.1 | v48.13,192.21 U10.A15 | v36.39,180.47 36.7,180.15 36.7,175.39 34.54,173.23 34.04,173.23 v33.94,173.33
  Bottom 0.254: v36.39,180.47 v48.13,192.21 | J36.1 29.72,162.05 31.62,163.96 32.26,163.96 35.43,167.13 35.43,171.89 35.37,171.89 v33.94,173.33
SOIL_PWR5  (via drill 0.38)
  Top 0.254: J46.1 98.63,154.61 J44.1 | v117.22,192.21 U12.A15 | v105.47,180.47 105.79,180.15 105.79,175.39 103.63,173.23 103.13,173.23 v103.02,173.33
  Bottom 0.254: v105.47,180.47 v117.22,192.21 | J44.1 98.81,162.05 100.71,163.96 101.35,163.96 104.52,167.13 104.52,171.89 104.46,171.89 v103.02,173.33
TEMP_DAT  (via drill 0.38)
  Top 0.254: J4.2 48.46,13.26 J6.2 | U2.A23 37.34,54.39 37.34,35.5 38.92,33.91 50.35,33.91 52.48,31.78 | 52.48,31.78 v53.21,31.05 | R11.2 51.94,31.24 52.48,31.78
  Bottom 0.254: U2.A18 44.45,56.92 44.45,53.09 43.69,52.32 40.67,52.32 U2.A23 | J4.2 48.46,27.12 52.2,30.86 53.02,30.86 v53.21,31.05
TEMP_DAT1  (via drill 0.38)
  Top 0.254: J11.2 117.55,13.26 J13.2 | U4.A23 106.43,54.39 106.43,35.5 108.01,33.91 119.44,33.91 121.57,31.78 | 121.57,31.78 v122.3,31.05 | R18.2 121.03,31.24 121.57,31.78
  Bottom 0.254: U4.A18 113.54,56.92 113.54,53.09 112.78,52.32 109.76,52.32 U4.A23 | J11.2 117.55,27.12 121.28,30.86 122.11,30.86 v122.3,31.05
TEMP_DAT2  (via drill 0.38)
  Top 0.254: J19.2 48.46,83.37 J21.2 | U6.A23 37.34,124.49 37.34,105.6 38.92,104.01 50.35,104.01 52.48,101.89 | 52.48,101.89 v53.21,101.16 | R27.2 51.94,101.35 52.48,101.89
  Bottom 0.254: U6.A18 44.45,127.03 44.45,123.19 43.69,122.43 40.67,122.43 U6.A23 | J19.2 48.46,97.23 52.2,100.97 53.02,100.97 v53.21,101.16
TEMP_DAT3  (via drill 0.38)
  Top 0.254: J27.2 117.55,83.37 J29.2 | U8.A23 106.43,124.49 106.43,105.6 108.01,104.01 119.44,104.01 121.57,101.89 | 121.57,101.89 v122.3,101.16 | R36.2 121.03,101.35 121.57,101.89
  Bottom 0.254: U8.A18 113.54,127.03 113.54,123.19 112.78,122.43 109.76,122.43 U8.A23 | J27.2 117.55,97.23 121.28,100.97 122.11,100.97 v122.3,101.16
TEMP_DAT4  (via drill 0.38)
  Top 0.254: J35.2 48.46,153.47 J37.2 | U10.A23 37.34,194.6 37.34,175.7 38.92,174.12 50.35,174.12 52.48,171.99 | 52.48,171.99 v53.21,171.26 | R45.2 51.94,171.45 52.48,171.99
  Bottom 0.254: U10.A18 44.45,197.13 44.45,193.29 43.69,192.53 40.67,192.53 U10.A23 | J35.2 48.46,167.33 52.2,171.07 53.02,171.07 v53.21,171.26
TEMP_DAT5  (via drill 0.38)
  Top 0.254: J43.2 117.55,153.47 J45.2 | U12.A23 106.43,194.6 106.43,175.7 108.01,174.12 119.44,174.12 121.57,171.99 | 121.57,171.99 v122.3,171.26 | R54.2 121.03,171.45 121.57,171.99
  Bottom 0.254: U12.A18 113.54,197.13 113.54,193.29 112.78,192.53 109.76,192.53 U12.A23 | J43.2 117.55,167.33 121.28,171.07 122.11,171.07 v122.3,171.26
TXO
  Bottom 0.254: U2.A16 46.86,51.69 42.42,47.24 13.21,47.24 J1.P$2
TXO1
  Bottom 0.254: U4.A16 115.95,51.69 111.51,47.24 82.3,47.24 J16.P$2
TXO2
  Bottom 0.254: U6.A16 46.86,121.79 42.42,117.35 13.21,117.35 J24.P$2
TXO3
  Bottom 0.254: U8.A16 115.95,121.79 111.51,117.35 82.3,117.35 J32.P$2
TXO4
  Bottom 0.254: U10.A16 46.86,191.9 42.42,187.45 13.21,187.45 J40.P$2
TXO5
  Bottom 0.254: U12.A16 115.95,191.9 111.51,187.45 82.3,187.45 J48.P$2
WDIR  (via drill 0.38)
  Top 0.254: 30.35,56.92 U2.A30 27.81,55.65 U2.A31 27.81,52.96 25.43,50.58 v25.43,36.13 | 30.35,56.92 U2.A28 | U2.A29 30.35,56.92 | D3.A 13.21,31.53 13.68,32 15.75,32 | 15.75,32 18.45,32 | 18.45,32 v21.46,32 D5.C | R8.1 15.75,32 | R10.1 18.29,31.84 18.45,32
  Bottom 0.254: v25.43,36.13 25.43,35.97 v21.46,32
WDIR1  (via drill 0.38)
  Top 0.254: 99.44,56.92 U4.A30 96.9,55.65 U4.A31 96.9,52.96 94.52,50.58 v94.52,36.13 | 99.44,56.92 U4.A28 | U4.A29 99.44,56.92 | D9.A 82.3,31.53 82.77,32 84.84,32 | 84.84,32 87.53,32 | 87.53,32 v90.55,32 D11.C | R15.1 84.84,32 | R17.1 87.38,31.84 87.53,32
  Bottom 0.254: v94.52,36.13 94.52,35.97 v90.55,32
WDIR2  (via drill 0.38)
  Top 0.254: 30.35,127.03 U6.A30 27.81,125.76 U6.A31 27.81,123.06 25.43,120.68 v25.43,106.24 | 30.35,127.03 U6.A28 | U6.A29 30.35,127.03 | D15.A 13.21,101.63 13.68,102.11 15.75,102.11 | 15.75,102.11 18.45,102.11 | 18.45,102.11 v21.46,102.11 D17.C | R24.1 15.75,102.11 | R26.1 18.29,101.95 18.45,102.11
  Bottom 0.254: v25.43,106.24 25.43,106.08 v21.46,102.11
WDIR3  (via drill 0.38)
  Top 0.254: 99.44,127.03 U8.A30 96.9,125.76 U8.A31 96.9,123.06 94.52,120.68 v94.52,106.24 | 99.44,127.03 U8.A28 | U8.A29 99.44,127.03 | D21.A 82.3,101.63 82.77,102.11 84.84,102.11 | 84.84,102.11 87.53,102.11 | 87.53,102.11 v90.55,102.11 D23.C | R33.1 84.84,102.11 | R35.1 87.38,101.95 87.53,102.11
  Bottom 0.254: v94.52,106.24 94.52,106.08 v90.55,102.11
WDIR4  (via drill 0.38)
  Top 0.254: 30.35,197.13 U10.A30 27.81,195.86 U10.A31 27.81,193.17 25.43,190.79 v25.43,176.34 | 30.35,197.13 U10.A28 | U10.A29 30.35,197.13 | D27.A 13.21,171.74 13.68,172.21 15.75,172.21 | 15.75,172.21 18.45,172.21 | 18.45,172.21 v21.46,172.21 D29.C | R42.1 15.75,172.21 | R44.1 18.29,172.05 18.45,172.21
  Bottom 0.254: v25.43,176.34 25.43,176.18 v21.46,172.21
WDIR5  (via drill 0.38)
  Top 0.254: 99.44,197.13 U12.A30 96.9,195.86 U12.A31 96.9,193.17 94.52,190.79 v94.52,176.34 | 99.44,197.13 U12.A28 | U12.A29 99.44,197.13 | D33.A 82.3,171.74 82.77,172.21 84.84,172.21 | 84.84,172.21 87.53,172.21 | 87.53,172.21 v90.55,172.21 D35.C | R51.1 84.84,172.21 | R53.1 87.38,172.05 87.53,172.21
  Bottom 0.254: v94.52,176.34 94.52,176.18 v90.55,172.21
WSPEED
  Top 0.254: R9.1 24.64,31.69 24.96,32 33.05,32 | 33.05,32 44.96,32 | 44.96,32 47.5,32 48.77,30.73 D4.A | D6.C 44.96,32 | U2.A27 32.89,32.16 33.05,32
WSPEED1
  Top 0.254: R16.1 93.73,31.69 94.04,32 102.14,32 | 102.14,32 114.05,32 | 114.05,32 116.59,32 117.86,30.73 D10.A | D12.C 114.05,32 | U4.A27 101.98,32.16 102.14,32
WSPEED2
  Top 0.254: R25.1 24.64,101.79 24.96,102.11 33.05,102.11 | 33.05,102.11 44.96,102.11 | 44.96,102.11 47.5,102.11 48.77,100.84 D16.A | D18.C 44.96,102.11 | U6.A27 32.89,102.27 33.05,102.11
WSPEED3
  Top 0.254: R34.1 93.73,101.79 94.04,102.11 102.14,102.11 | 102.14,102.11 114.05,102.11 | 114.05,102.11 116.59,102.11 117.86,100.84 D22.A | D24.C 114.05,102.11 | U8.A27 101.98,102.27 102.14,102.11
WSPEED4
  Top 0.254: R43.1 24.64,171.89 24.96,172.21 33.05,172.21 | 33.05,172.21 44.96,172.21 | 44.96,172.21 47.5,172.21 48.77,170.94 D28.A | D30.C 44.96,172.21 | U10.A27 32.89,172.37 33.05,172.21
WSPEED5
  Top 0.254: R52.1 93.73,171.89 94.04,172.21 102.14,172.21 | 102.14,172.21 114.05,172.21 | 114.05,172.21 116.59,172.21 117.86,170.94 D34.A | D36.C 114.05,172.21 | U12.A27 101.98,172.37 102.14,172.21